# Altium PCB joystickDisplay.PcbDoc
Units mm, origin at the board's own origin, x right, y up, seen from the top; angles counter-clockwise.
Board outline 100 x 50 mm, 2 copper layers (Top Layer, Bottom Layer); 23 components, 40 nets, 102 pads, 16 vias.
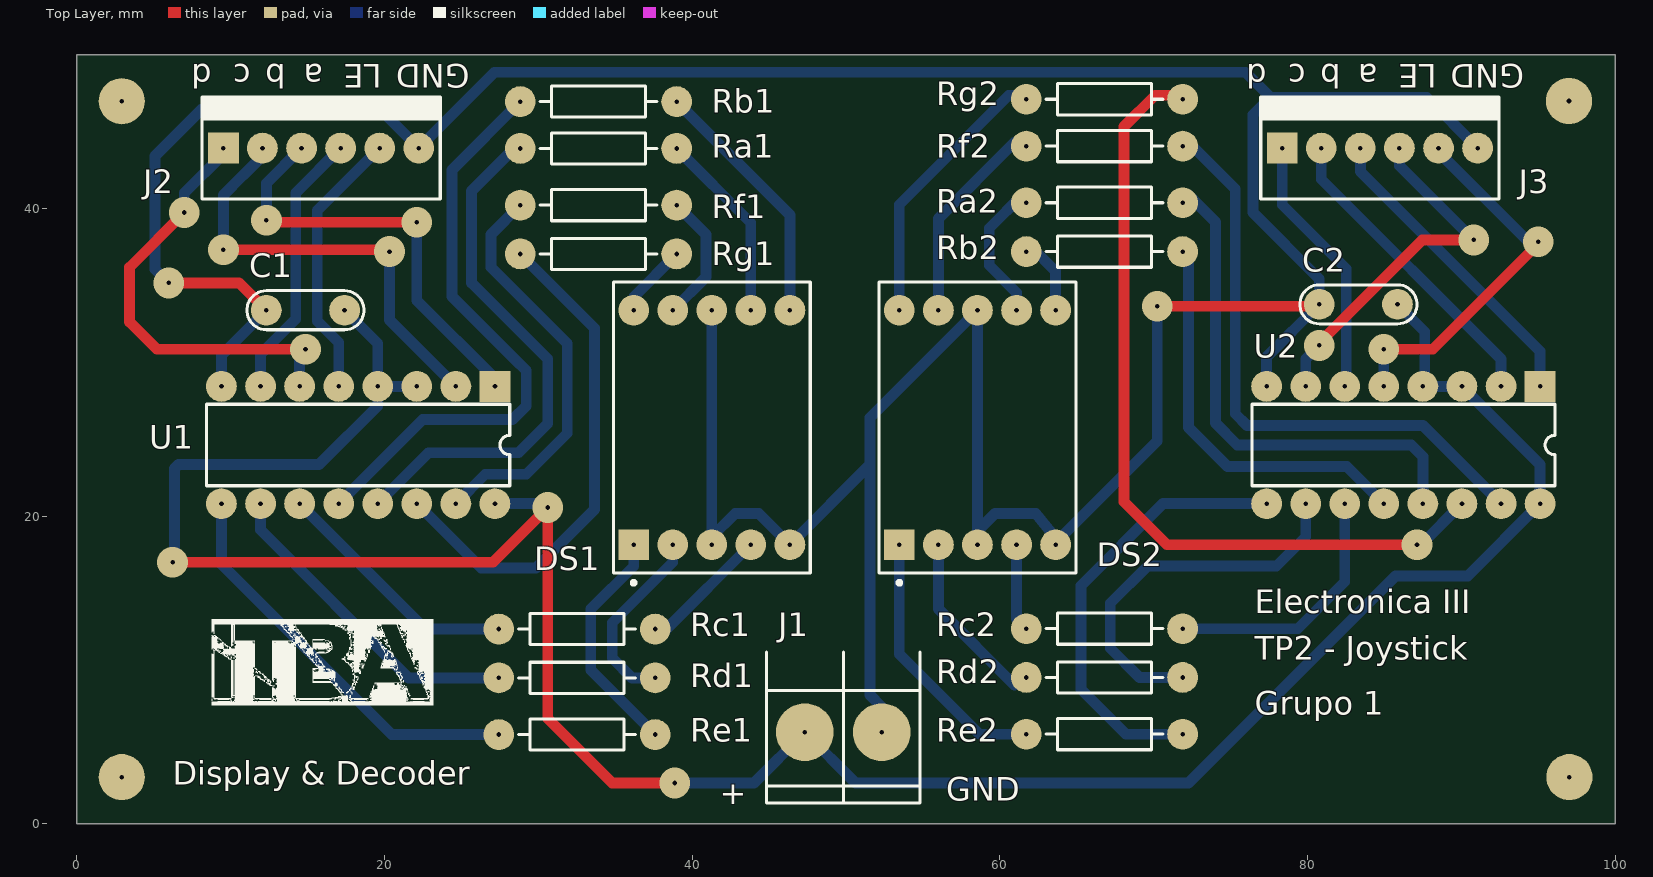
[diagram p0: Top Layer view]
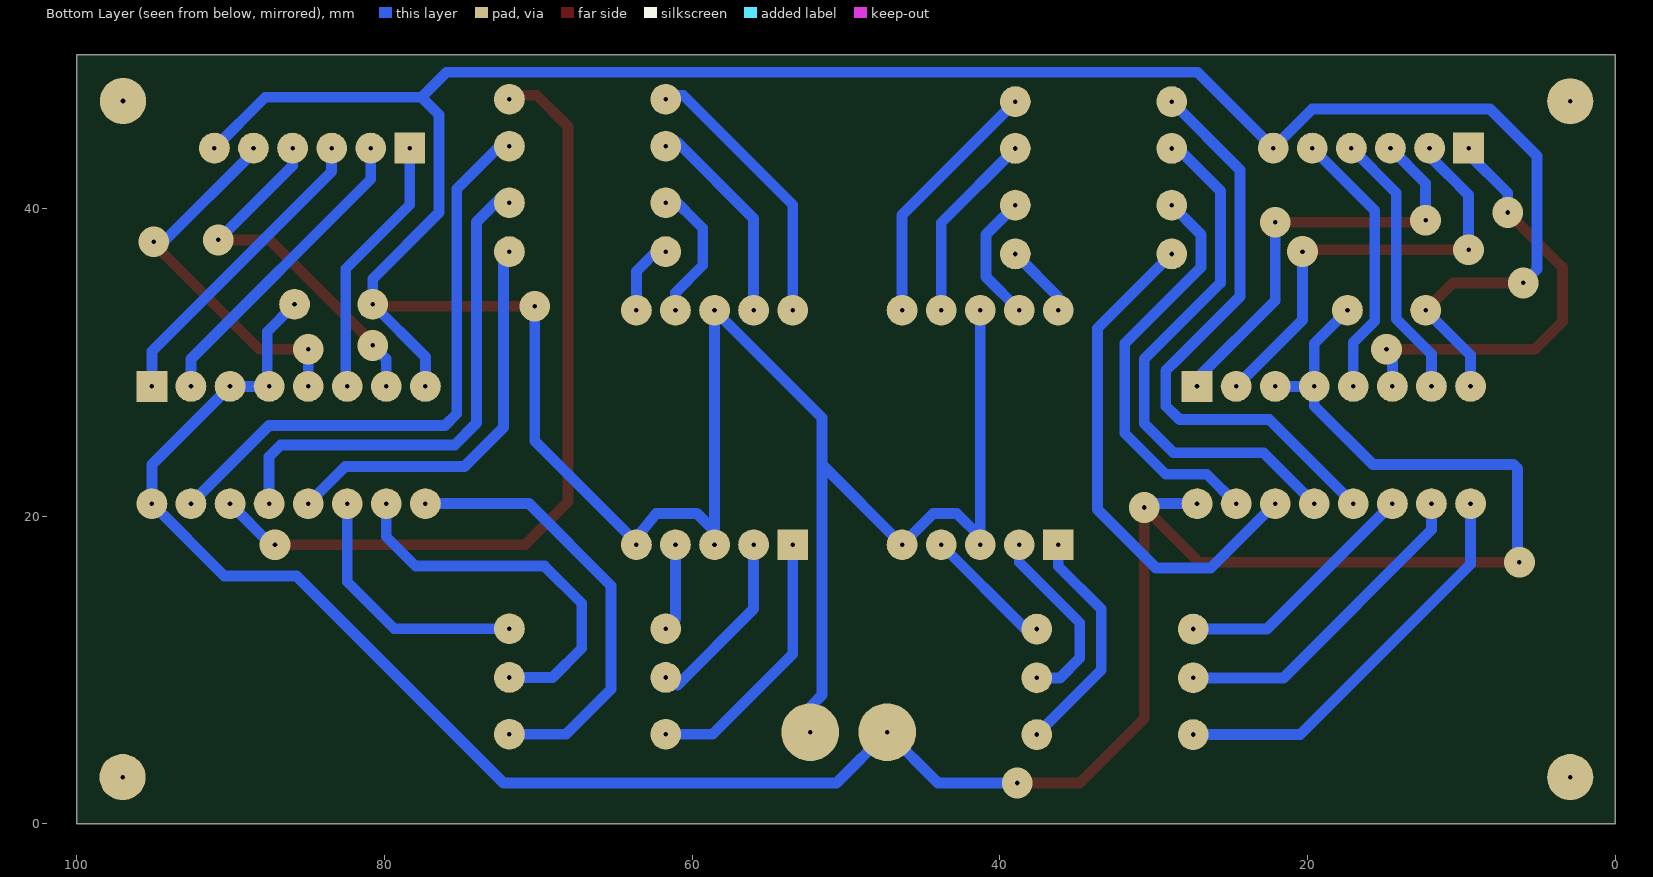
[diagram p1: Bottom Layer view, seen from below]

## Layer stack, top to bottom
Top Solder: solder mask 0.0102, Solder Resist, Dk 3.5
Top Layer: signal copper 0.0356
Dielectric 1: dielectric 0.32, FR-4, Dk 4.8
Bottom Layer: signal copper 0.0356
Bottom Solder: solder mask 0.0102, Solder Resist, Dk 3.5

## Board outline
0,0 100,0 100,50 0,50

## Design rules (kind name [scope] priority, off if disabled: settings)
Clearance [All] p1: gap=0.4 ignorepadtopadclearanceinfootprint=FALSE
PolygonConnect [All] p1: connectstyle=Relief reliefconductorwidth=0.254 reliefentries=4 polygonreliefangle="90 Angle" airgapwidth=0.254
RoutingVias [All] p1: holewidth=0.3 width=2 viastyle="Through Hole" minholewidth=0.3 minwidth=2 maxholewidth=0.3 maxwidth=2
SolderMaskExpansion [All] p1: expansion=0.102
Width [All] p1: maxlimit=0.9 minlimit=0.7 preferedwidth=0.7
30 further rules are at their usual default settings.

## Components (designator, comment, footprint, x,y, rotation, side; value= is the part's Value field where it differs from the comment)
C1 "CAP" CAP200 14.859,33.401 r180 top
C2 "CAP" CAP200 83.312,33.782 r180 top
DS1 "Dpy Blue-CC" H 41.275,25.781 r0 top
DS2 "Dpy Blue-CC" H 58.547,25.781 r0 top
J1 "BORNERA 2" BORNERA2 49.824,5.969 r90 top
J2 "MOLEX6" MOLEX6 9.525,43.942 r0 top
J3 "MOLEX6" MOLEX6 78.359,43.942 r0 top
Ra1 "RES" RES400 28.829,43.917 r0 top
Ra2 "RES" RES400 71.882,40.386 r180 top
Rb1 "RES" RES400 28.829,46.965 r0 top
Rb2 "RES" RES400 71.882,37.211 r180 top
Rc1 "RES" RES400 27.432,12.675 r0 top
Rc2 "RES" RES400 71.882,12.7 r180 top
Rd1 "RES" RES400 27.432,9.5 r0 top
Rd2 "RES" RES400 71.882,9.525 r180 top
Re1 "RES" RES400 27.432,5.817 r0 top
Re2 "RES" RES400 71.882,5.842 r180 top
Rf1 "RES" RES400 28.829,40.234 r0 top
Rf2 "RES" RES400 71.882,44.069 r180 top
Rg1 "RES" RES400 28.829,37.059 r0 top
Rg2 "RES" RES400 71.882,47.117 r180 top
U1 "MC74HC4511N" 648-08 18.288,24.638 r180 top
U2 "MC74HC4511N" 648-08 86.233,24.638 r180 top

## Footprints (in the part's own frame and the unit in brackets; to place one, negate y for a bottom-side part, rotate by r counter-clockwise, add the part's x,y. Pads: shape width x height; smd on the part's side, far side on the other; paste and mask are expansions set on the pad)
648-08 [mm] "DIP; 16 Leads; Row Spacing 7.62 mm; Pitch 2.54 mm"
  rect 2x2 hole 0.3: 1(-8.89,-3.81)
  round 2 hole 0.3: 2(-6.35,-3.81) 3(-3.81,-3.81) 4(-1.27,-3.81) 5(1.27,-3.81) 6(3.81,-3.81) 7(6.35,-3.81) 8(8.89,-3.81) 9(8.89,3.81) 10(6.35,3.81) 11(3.81,3.81) 12(1.27,3.81) 13(-1.27,3.81) 14(-3.81,3.81) 15(-6.35,3.81) 16(-8.89,3.81)
  silkscreen extent -9.85,-2.65 9.85,2.65
BORNERA2 [mm] "Bornera con Tornillos 5mm separación"
  round 3.75 hole 0.3: 1(0,2.5) 2(0,-2.5)
  silkscreen extent -4.6,-5 5.2,5, body extent -3.76,-4.89 3.94,5.61, height 10
CAP200 [mm]
  round 2 hole 0.3: 1(-2.54,0) 2(2.54,0)
  silkscreen extent -3.81,-1.27 3.81,1.27, body extent -2.79,-1.17 2.79,1.12, height 6.24
H [mm] "LED, 7-Segment Display, 14.2 mm, RHD; 10 Leads; Row Space 15.24 mm; Pitch 2.54 mm"
  rect 2x2 hole 0.3: 1(-5.08,-7.62)
  round 2 hole 0.3: 2(-2.54,-7.62) 3(0,-7.62) 4(2.54,-7.62) 5(5.08,-7.62) 6(5.08,7.62) 7(2.54,7.62) 8(0,7.62) 9(-2.54,7.62) 10(-5.08,7.62)
  silkscreen extent -6.4,-10.22 6.4,9.45, body extent -6.4,-9.45 6.4,9.45, height 8.25
MOLEX6 [mm]
  rect 2x2 hole 0.3: 1(0,0)
  round 2 hole 0.3: 2(2.54,0) 3(5.08,0) 4(7.62,0) 5(10.16,0) 6(12.7,0)
  silkscreen extent -1.4,-3.3 14.1,3.3, body extent -1.27,-3.17 13.97,3.17, height 10.74
RES400 [mm]
  round 2 hole 0.3: 1(0,0) 2(10.16,0)
  silkscreen extent 1.27,-1.02 8.89,1.02, body extent -0.3,-1.14 10.46,1.17, height 2.43

## Part data
DS1 DS2: "14.2 mm General Purpose Blue 7-Segment Display: CC, RH DP, Gray Surface", Colour=Blue, ComponentLink1Description="Manufacturer Link", ComponentLink1URL=http://www.agilent.com/, DatasheetVersion=24-Sep-2002, LatestRevisionDate=17-Dec-2003, LatestRevisionNote="Schematic revised, PCB Footprint replaced.", MinimumIntensity="2020 ucd", Note="IF = 10 mA", PackageDescription="LED, 7-Segment Display, 14.2 mm, RHD; 10 Leads; Row Space 15.24 mm; Pitch 2.54 mm", PackageReference=H, PackageVersion=24-Sep-2002, Published=8-Jun-2000, Publisher="Altium Limited"
U1 U2: "BCD-to-Seven-Segment Latch/Decoder/Display Driver", Code_JEDEC=MS-001-BB, ComponentLink1Description="Manufacturer Link", ComponentLink1URL=http://www.onsemi.com/site/products/parametrics/0,4446,197,00.html, DatasheetVersion=1989, LatestRevisionDate=06-Jun-2005, LatestRevisionNote="Stylized 3D Model Added.", PackageDescription="DIP; 16 Leads; Row Spacing 7.62 mm; Pitch 2.54 mm", PackageReference=648-08, Published=17-Jul-2002, Publisher="Altium Limited"

## Free pads (board coordinates)
  round 3 hole 0.3: 2(2.921,3.048) 2(2.921,46.99) 2(97,47) 2(97.028,3.048)

## Via types
v1: diameter 2, hole 0.3, Top Layer to Bottom Layer, 16 vias

## Nets (pads, with @x,y where several pads share a name; then routed paths per layer and width w, separated by ;. In a path a pad name is that pad's centre, name@x,y a point inside that pad or via, vN(x,y) a via of type N, cw(c..) or ccw(c..) an arc to the next point about the centre after c; other vN are vias at no path point)
GND: C1.2 C2.2 DS1.3 DS1.5 DS1.8 DS2.3 DS2.5 DS2.8 J1.2 J2.6 J3.6 U1.8 U2.8 | length 246.8
  Top Layer w0.7: v1(5.969,35.179) 10.541,35.179 C1.2 ; v1(70.231,33.655) 80.645,33.655 C2.2
  Bottom Layer w0.7: v1(5.969,35.179) 5.08,36.068 5.08,43.434 8.128,46.482 19.685,46.482 J2.6 27.15,48.867 75.974,48.867 77.597,47.244 ; U1.8 9.398,30.48 C1.2 ; DS1.3 DS1.3@41.275,18.669 ; DS1.8 DS1.3@41.275,18.669 ; J1.2 52.324,7.62 51.562,8.382 51.562,23.368 ; DS2.3 DS2.3@58.547,19.05 ; v1(70.231,33.655) 70.231,24.892 63.779,18.44 62.335,20.193 59.69,20.193 DS2.3@58.547,19.05 ; U2.8 77.343,30.353 C2.2 80.772,35.433 76.454,39.751 76.454,46.101 77.597,47.244 ; J3.6 87.757,47.244 77.597,47.244 ; DS1.3@41.275,18.669 42.799,20.193 44.323,20.193 DS1.5 51.562,23.368 ; 51.562,23.368 51.562,26.416 DS2.8 DS2.3@58.547,19.05
LE1: J2.5 U1.5 | length 18.3
  Bottom Layer w0.7: U1.5 17.018,31.307 15.621,32.704 15.621,39.878 J2.5 J2.5@19.685,44.45
LE2: J3.5 U2.5 | length 24.6
  Top Layer w0.7: v1(84.963,30.861) 88.138,30.861 94.996,37.719 v1(94.996,37.846)
  Bottom Layer w0.7: U2.5 v1(84.963,30.861) ; J3.5 88.519,43.688 94.361,37.846 v1(94.996,37.846)
NetDS1_1: DS1.1 Re1.2 | length 15.2
  Bottom Layer w0.7: DS1.1 36.195,16.764 33.401,13.97 33.401,10.008 Re1.2
NetDS1_2: DS1.2 Rd1.2 | length 12.3
  Bottom Layer w0.7: Rd1.2 36.093,9.5 34.798,10.795 34.798,13.081 38.735,17.018 DS1.2
NetDS1_4: DS1.4 Rc1.2 | length 8.5
  Bottom Layer w0.7: Rc1.2 38.329,12.675 DS1.4
NetDS1_6: DS1.6 Rb1.2 | length 16.6
  Bottom Layer w0.7: Rb1.2 46.355,39.599 DS1.6
NetDS1_7: DS1.7 Ra1.2 | length 12.5
  Bottom Layer w0.7: Ra1.2 43.815,39.091 DS1.7
NetDS1_9: DS1.9 Rf1.2 | length 8.5
  Bottom Layer w0.7: DS1.9 40.894,35.56 40.894,38.329 Rf1.2
NetDS1_10: DS1.10 Rg1.2 | length 4.8
  Bottom Layer w0.7: DS1.10 36.195,34.265 Rg1.2
NetDS2_1: DS2.1 Re2.2 | length 17.5
  Bottom Layer w0.7: DS2.1 53.467,11.049 58.674,5.842 Re2.2
NetDS2_2: DS2.2 Rd2.2 | length 11.2
  Bottom Layer w0.7: DS2.2 56.007,13.97 Rd2.2@60.96,9.017
NetDS2_4: DS2.4 Rc2.2 | length 4.8
  Bottom Layer w0.7: Rc2.2@61.087,13.335 DS2.4
NetDS2_6: DS2.6 Rb2.2 | length 4.7
  Bottom Layer w0.7: Rb2.2@62.103,37.465 63.627,35.941 DS2.6
NetDS2_7: DS2.7 Ra2.2 | length 9.8
  Bottom Layer w0.7: DS2.7 61.087,34.544 59.309,36.322 59.309,38.735 61.468,40.894 Ra2.2@62.103,40.894
NetDS2_9: DS2.9 Rf2.2 | length 14.1
  Bottom Layer w0.7: DS2.9 56.007,39.37 60.96,44.323 Rf2.2@62.103,44.323
NetDS2_10: DS2.10 Rg2.2 | length 18.4
  Bottom Layer w0.7: DS2.10 53.467,40.259 60.579,47.371 Rg2.2@62.103,47.371
NetJ2_1: J2.1 U1.6 | length 27.8
  Top Layer w0.7: v1(6.985,39.751) 3.429,36.195 3.429,32.639 5.207,30.861 v1(14.859,30.861)
  Bottom Layer w0.7: v1(6.985,39.751) 6.985,41.021 9.525,43.561 J2.1 ; U1.6 14.478,30.099 v1@14.605,30.226
NetJ2_2: J2.2 U1.2 | length 29.7
  Top Layer w0.7: v1(9.525,37.338) 20.193,37.338 v1(20.32,37.211)
  Bottom Layer w0.7: v1(9.525,37.338) 9.525,40.894 10.823,42.192 10.836,42.192 12.065,43.421 J2.2 J2.2@11.811,43.688 ; v1(20.32,37.211) 20.32,32.766 U1.2 U1.2@24.638,28.702
NetJ2_3: J2.3 U1.1 | length 28.4
  Top Layer w0.7: v1(12.319,39.243) 12.446,39.116 v1(22.098,39.116)
  Bottom Layer w0.7: v1(12.319,39.243) 12.319,41.656 J2.3 ; v1@22.225,38.989 v1(22.098,39.116) 22.098,34.036 27.178,28.956 U1.1
NetJ2_4: J2.4 U1.7 | length 17.7
  Bottom Layer w0.7: U1.7 11.938,30.545 14.224,32.831 14.224,41.021 J2.4
NetJ3_1: J3.1 U2.6 | length 17.3
  Bottom Layer w0.7: J3.1 78.359,40.259 82.522,36.096 82.522,28.547 U2.6
NetJ3_2: J3.2 U2.2 | length 20.3
  Bottom Layer w0.7: J3.2 80.899,41.91 92.583,30.226 U2.2
NetJ3_3: J3.3 U2.1 | length 20.3
  Bottom Layer w0.7: J3.3 83.439,42.418 95.123,30.734 U2.1
NetJ3_4: J3.4 U2.7 | length 23.6
  Top Layer w0.7: v1(80.772,31.115) 80.772,31.276 87.469,37.973 v1(90.805,37.973)
  Bottom Layer w0.7: U2.7 79.883,30.226 v1@80.518,30.861 ; J3.4 85.979,42.799 v1(90.805,37.973)
NetRa1_1: Ra1.1 U1.13 | length 34.7
  Bottom Layer w0.7: U1.13 22.86,24.13 28.702,24.13 30.607,26.035 30.607,30.226 25.654,35.179 25.654,41.148 28.423,43.917 Ra1.1
NetRa2_1: Ra2.1 U2.13 | length 33.4
  Bottom Layer w0.7: Ra2.1@72.263,40.894 74.013,39.144 74.013,26.063 75.438,24.638 86.741,24.638 87.503,23.876 U2.13 U2.13@87.249,21.082
NetRb1_1: Rb1.1 U1.12 | length 38.5
  Bottom Layer w0.7: U1.12 22.479,26.289 28.321,26.289 29.21,27.178 29.21,29.477 28.489,30.198 28.476,30.198 24.384,34.29 24.384,42.52 Rb1.1
NetRb2_1: Rb2.1 U2.12 | length 26.4
  Bottom Layer w0.7: Rb2.1@72.263,37.465 72.263,25.781 74.803,23.241 82.55,23.241 U2.12
NetRc1_1: Rc1.1 U1.11 | length 16.3
  Bottom Layer w0.7: U1.11 22.631,12.675 Rc1.1
NetRc2_1: Rc2.1 U2.11 | length 16.9
  Bottom Layer w0.7: Rc2.1 79.375,12.7 82.423,15.748 U2.11
NetRd1_1: Rd1.1 U1.10 | length 21.2
  Bottom Layer w0.7: U1.10 11.938,19.126 21.565,9.5 Rd1.1
NetRd2_1: Rd2.1 U2.10 | length 25.1
  Bottom Layer w0.7: Rd2.1 69.088,9.525 67.183,11.43 67.183,14.351 69.596,16.764 77.978,16.764 79.883,18.669 U2.10
NetRe1_1: Re1.1 U1.9 | length 26.6
  Bottom Layer w0.7: U1.9 9.398,16.891 20.472,5.817 Re1.1
NetRe2_1: Re2.1 U2.9 | length 28.8
  Bottom Layer w0.7: Re2.1 68.199,5.842 65.278,8.763 65.278,15.494 70.612,20.828 U2.9
NetRf1_1: Rf1.1 U1.15 | length 26.8
  Bottom Layer w0.7: U1.15 26.543,22.733 29.21,22.733 31.877,25.4 31.877,31.242 26.924,36.195 26.924,38.329 Rf1.1
NetRf2_1: Rf2.1 U2.15 | length 38.6
  Bottom Layer w0.7: Rf2.1@72.263,44.323 75.311,41.275 75.311,26.67 76.073,25.908 87.503,25.908 U2.15
NetRg1_1: Rg1.1 U1.14 | length 33.5
  Bottom Layer w0.7: U1.14 26.289,16.637 29.845,16.637 33.655,20.447 33.655,32.233 Rg1.1
NetRg2_1: Rg2.1 U2.14 | length 53.6
  Top Layer w0.7: Rg2.1@72.263,47.371 70.104,47.371 68.072,45.339 68.072,20.955 70.866,18.161 v1(87.122,18.161)
  Bottom Layer w0.7: v1(87.122,18.161) 87.376,18.161 U2.14
vcc: C1.1 C2.1 J1.1 U1.3 U1.4 U1.16 U2.3 U2.4 U2.16 | length 169.5
  Top Layer w0.7: v1(6.223,17.018) 27.051,17.018 v1(30.607,20.574) 30.607,6.858 34.798,2.667 v1(38.862,2.667)
  Bottom Layer w0.7: v1(6.223,17.018) 6.223,16.764 6.35,16.637 6.35,23.114 6.604,23.368 15.748,23.368 19.558,27.178 U1.4 ; C1.1 19.558,31.242 U1.4 ; U1.3 U1.4 ; U1.16 30.353,20.828 v1(30.607,20.574) ; v1(38.862,2.667) 44.022,2.667 J1.1 50.626,2.667 72.263,2.667 85.725,16.129 90.424,16.129 U2.16 95.123,23.368 U2.3 U2.4 87.63,28.575 87.63,32.004 C2.1

## Silkscreen, mask and mechanical layers (free items; w line width, h text height)
Top Overlay:
  drawing of 174 lines, arcs and shapes, not listed
  text "d" at 8.763,49.403 h1.52 r180
  text "c" at 11.303,49.403 h1.52 r180
  text "b" at 13.589,49.403 h1.52 r180
  text "a" at 16.002,49.403 h1.52 r180
  text "LE" at 19.812,49.403 h1.52 r180
  text "GND" at 25.527,49.403 h1.52 r180
  text "d" at 77.343,49.403 h1.52 r180
  text "c" at 79.883,49.403 h1.52 r180
  text "b" at 82.169,49.403 h1.52 r180
  text "a" at 84.582,49.403 h1.52 r180
  text "LE" at 88.392,49.403 h1.52 r180
  text "GND" at 94.107,49.403 h1.52 r180
  text "Electronica III" at 76.581,13.716 h1.52
  text "TP2 - Joystick" at 76.581,10.668 h1.52
  text "Grupo 1" at 76.581,7.112 h1.52
  text "Display & Decoder" at 6.223,2.54 h1.52
  text "GND" at 56.515,1.524 h1.52
  text "+" at 41.783,1.27 h1.52
Mechanical 15:
  the board outline again, w0.2